# Allegro board ex2_rlc.brd
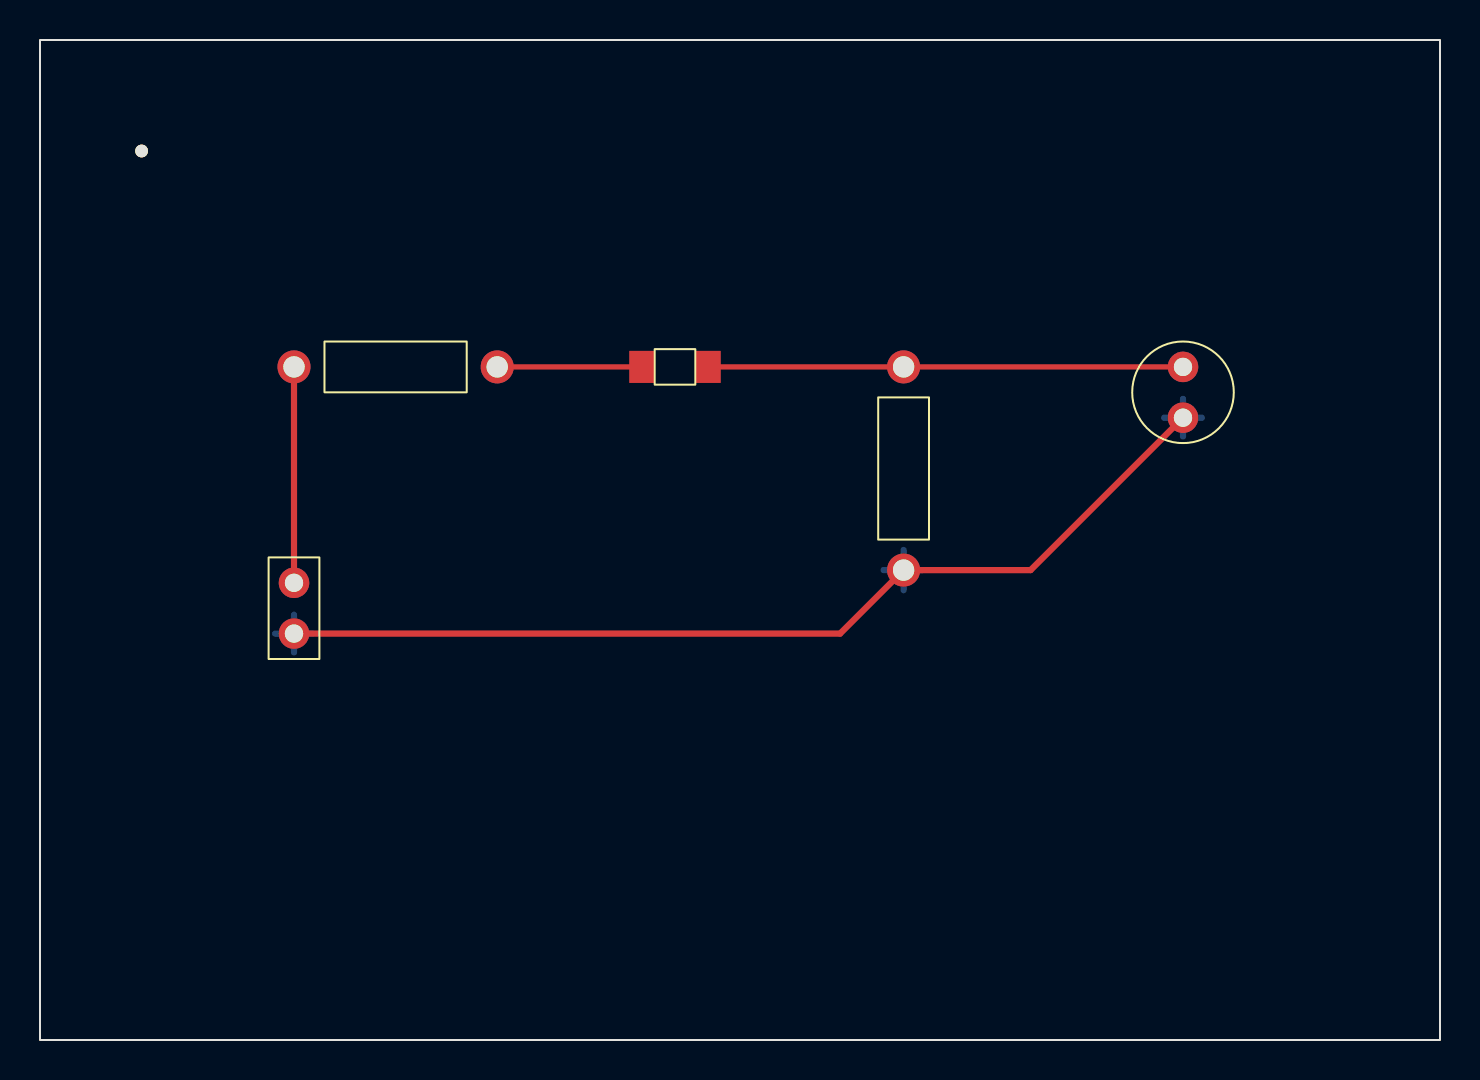
[diagram p0: board, top side]
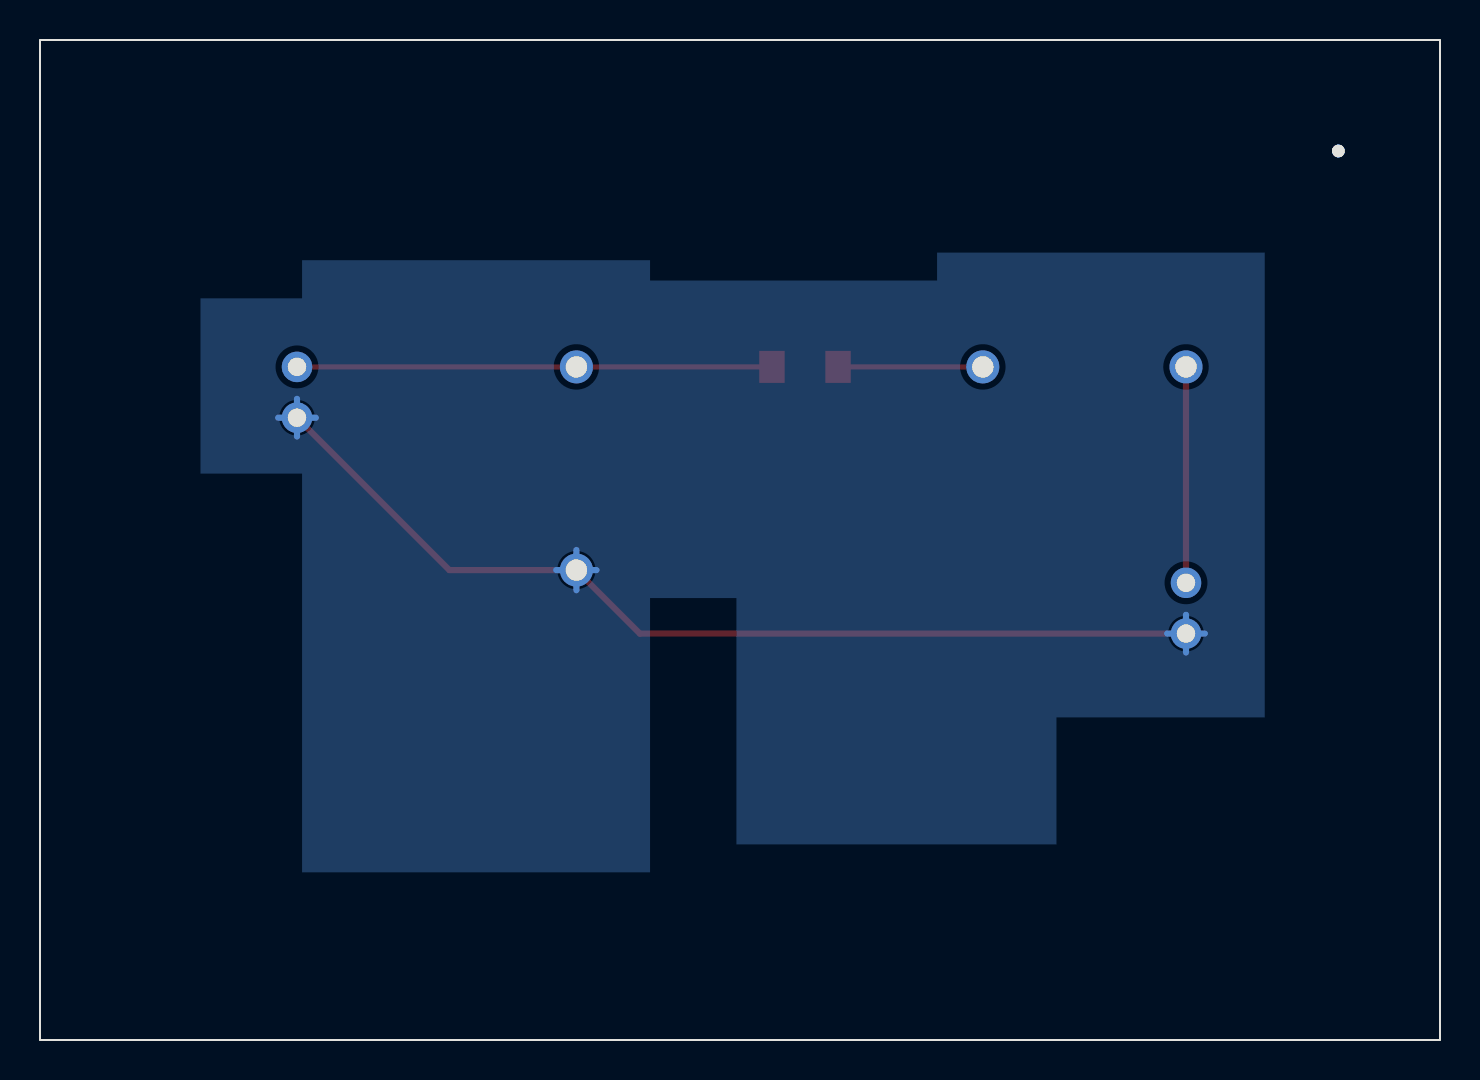
[diagram p1: board, bottom side, seen from below]

Outline 70 x 50 mm; copper layers: TOP, BOTTOM. Coordinates in mm from the lower left corner of the outline.
Outline path: rectangle 0,0 70,50

## Design rules (mm)
constraint set DEFAULT: min track width 0.254
net group BASENETS: nets N00094 N00125
net group POWERNETS: nets VCC

## Placement (name value [footprint] x y rotation side)
C1  1u  [CAP196]  57.15 31.12 0 top
J1  CON2  [JUMPER2]  12.7 22.86 270 top
L1  100n  [SMDRES]  31.75 33.66 0 top
NOREF  -  [unnamed]  5.08 44.45 0 top
R1  330  [RES400]  22.86 33.66 90 top
R2  330  [RES400]  43.18 33.66 180 top

## Library data of the parts
C1 = CAP NP: Tolerance: ***; User Part Number: ***
J1 = CON2: User Part Number: ***
L1 = INDUCTOR: Tolerance: ***; User Part Number: ***
R1 R2 = R: Tolerance: ***; User Part Number: ***

## Footprints (pads in the part's own frame, mm; a bottom-side part is the same pattern mirrored in y, then rotated)
CAP196
  round 1.524 hole 0.914: 1(0,0) 2(0,2.54)
JUMPER2
  round 1.524 hole 0.914: 1(0,0) 2(2.54,0)
RES400
  round 1.651 hole 1.067: 1(0,0) 2(0,10.16)
SMDRES
  rect 1.27x1.6 smd: 1(-1.651,0) 2(1.651,0)
unnamed
  round 0.635 hole 3.175 unplated: (0,0)

## Nets
GND: C1.1 J1.2 R2.2
VCC: J1.1 R1.2
N00094: L1.1 R1.1
N00125: C1.2 L1.2 R2.1

## Routing (per net, layer and track width the routed paths; a pad name or vN(x,y) marks a point on that pad's centre or on a via; arc(x,y) is an arc through that point)
GND: length 60.5
  TOP w0.308: C1.1 49.53,23.5 R2.2 40.01,20.32 J1.2
  BOTTOM w0.308: C1.1 57.15,32.06 ; C1.1 56.21,31.12 ; C1.1 57.15,30.17 ; C1.1 58.09,31.12 ; J1.2 12.7,21.26 ; J1.2 11.76,20.32 ; J1.2 12.7,19.38 ; J1.2 13.64,20.32 ; R2.2 44.19,23.5 ; R2.2 43.18,22.49 ; R2.2 43.18,24.5 ; R2.2 42.17,23.5
VCC: length 10.8
  TOP w0.308: R1.2 J1.1
N00094: length 7.2
  TOP w0.254: 30.1,33.66 R1.1
N00125: length 23.7
  TOP w0.254: L1.2 R2.1 C1.2

## Copper pours and planes (outline as drawn; the poured copper is in the pictures)
GND on BOTTOM: 8.76,39.37 25.15,39.37 25.15,37.97 39.5,37.97 39.5,38.99 56.9,38.99 56.9,37.08 61.98,37.08 61.98,28.32 56.9,28.32 56.9,8.38 39.5,8.38 39.5,22.1 35.18,22.1 35.18,9.78 19.18,9.78 19.18,16.13 8.76,16.13
